# EAGLE board untitled (EAGLE 8.7.1)

Size 21.59 x 13.97 mm. Coordinates in mm from the lower left corner, seen from the top.
Outline: 0,11.43 0,2.54 arc90 2.54,0 19.05,0 arc90 21.59,2.54 21.59,11.43 arc90 19.05,13.97 2.54,13.97 arc90 0,11.43
Copper layers (1*16): Top 0.035mm / dielectric 1.5mm / Bottom 0.035mm
Design rules "default": minimum track width 6mil, minimum drill 0.35mm, track to track 6mil, track to pad 6mil, pad to pad 6mil, via to via 6mil, smd to smd 6mil, copper to edge 40mil, drill to drill 6mil, minimum pad ring 10mil, minimum via ring 8mil, stop-mask expansion 4mil, vias tented up to drill 0mil, thermal gap 10mil

## Footprints (pad centres in the part's own frame; a part is rotated, then mirrored left to right if it is on the bottom)
MAX4466 = drill 1 pad 1.93: 1 4.953,1.524; 2 7.493,1.524; 3 10.033,1.524 | hole 2.5: 2.54,19.304; 12.192,19.304

## Placement (x,y rotation side)
E$1  [MAX4466]  21.59,-0.38 90 top

## Library data of the parts
E$1 = untitled